# Altium PCB Bessel_SallenKey_PCB.PcbDoc
Units mm, origin at the board's own origin, x right, y up, seen from the top; angles counter-clockwise.
Board outline 37.57 x 49.43 mm, 2 copper layers (Top Layer, Bottom Layer); 33 components, 20 nets, 72 pads, 0 vias.
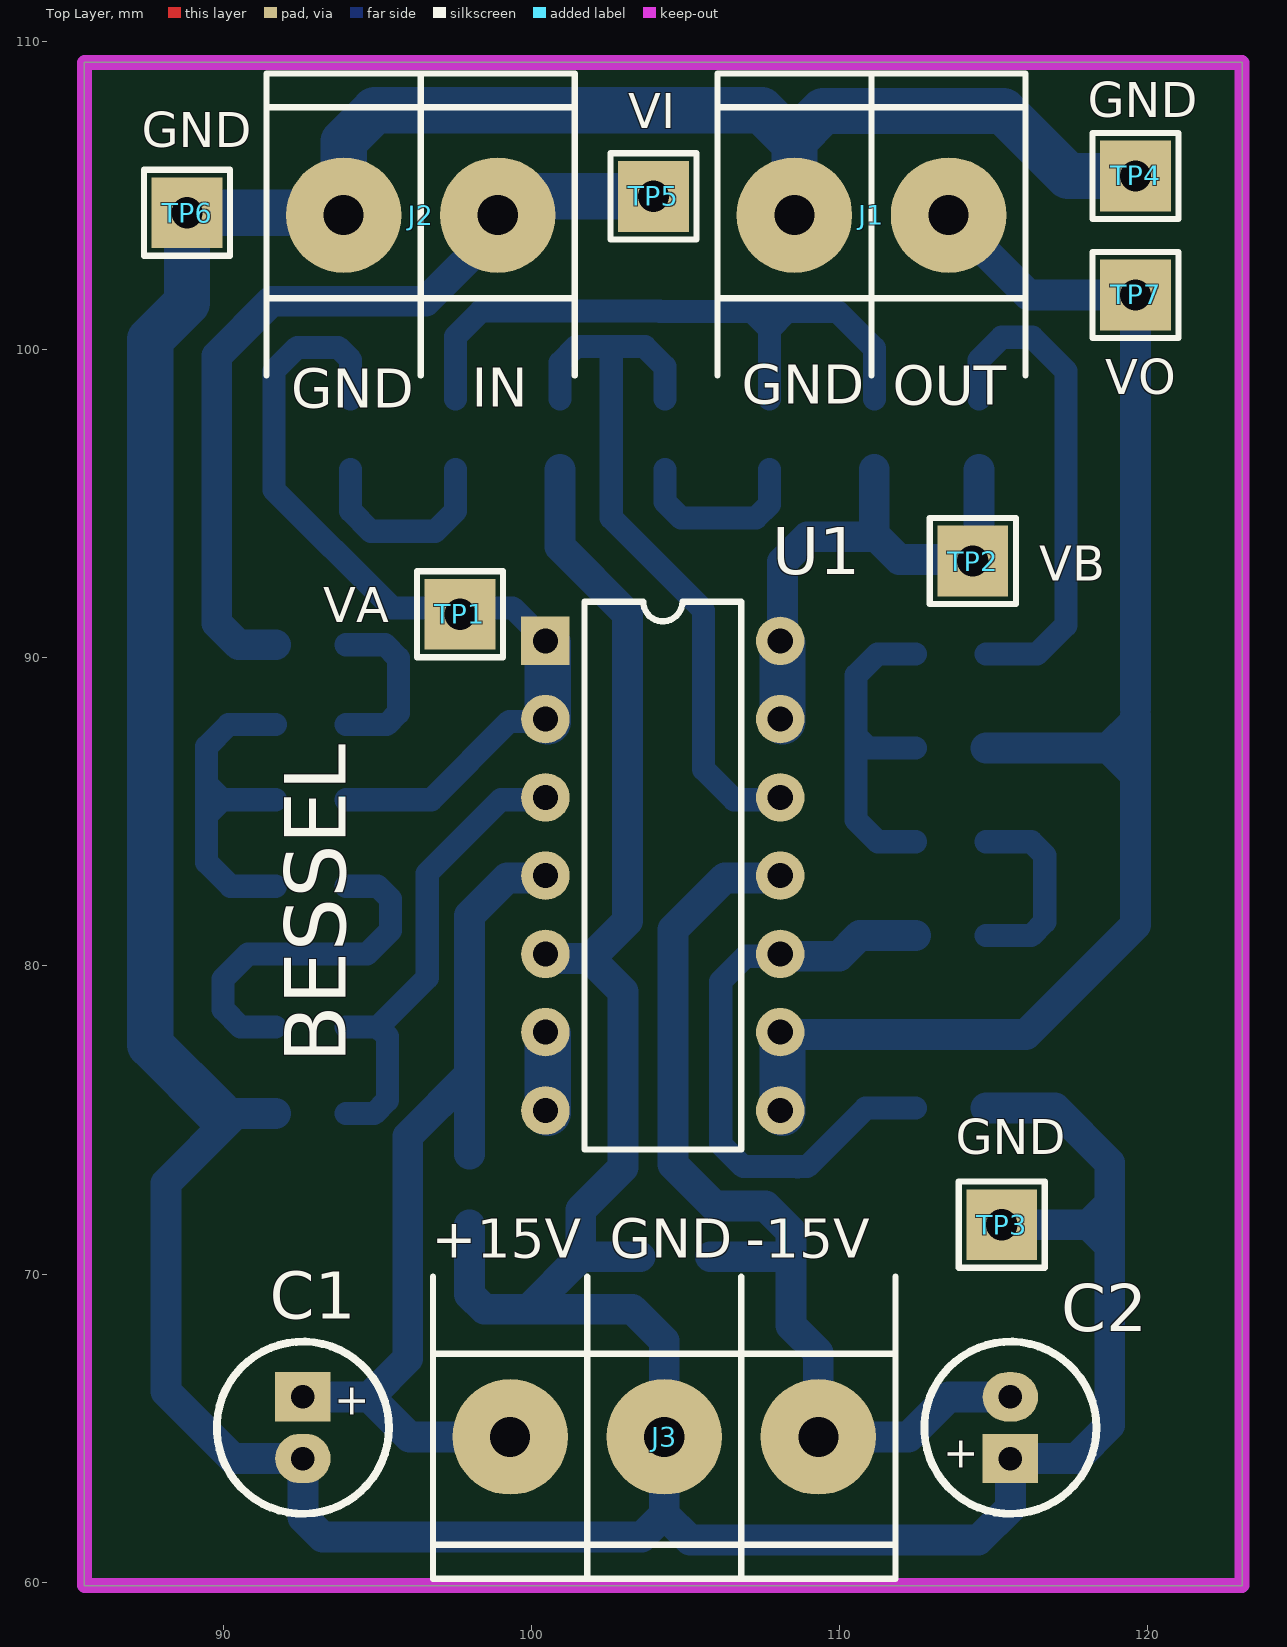
[diagram p0: Top Layer view]
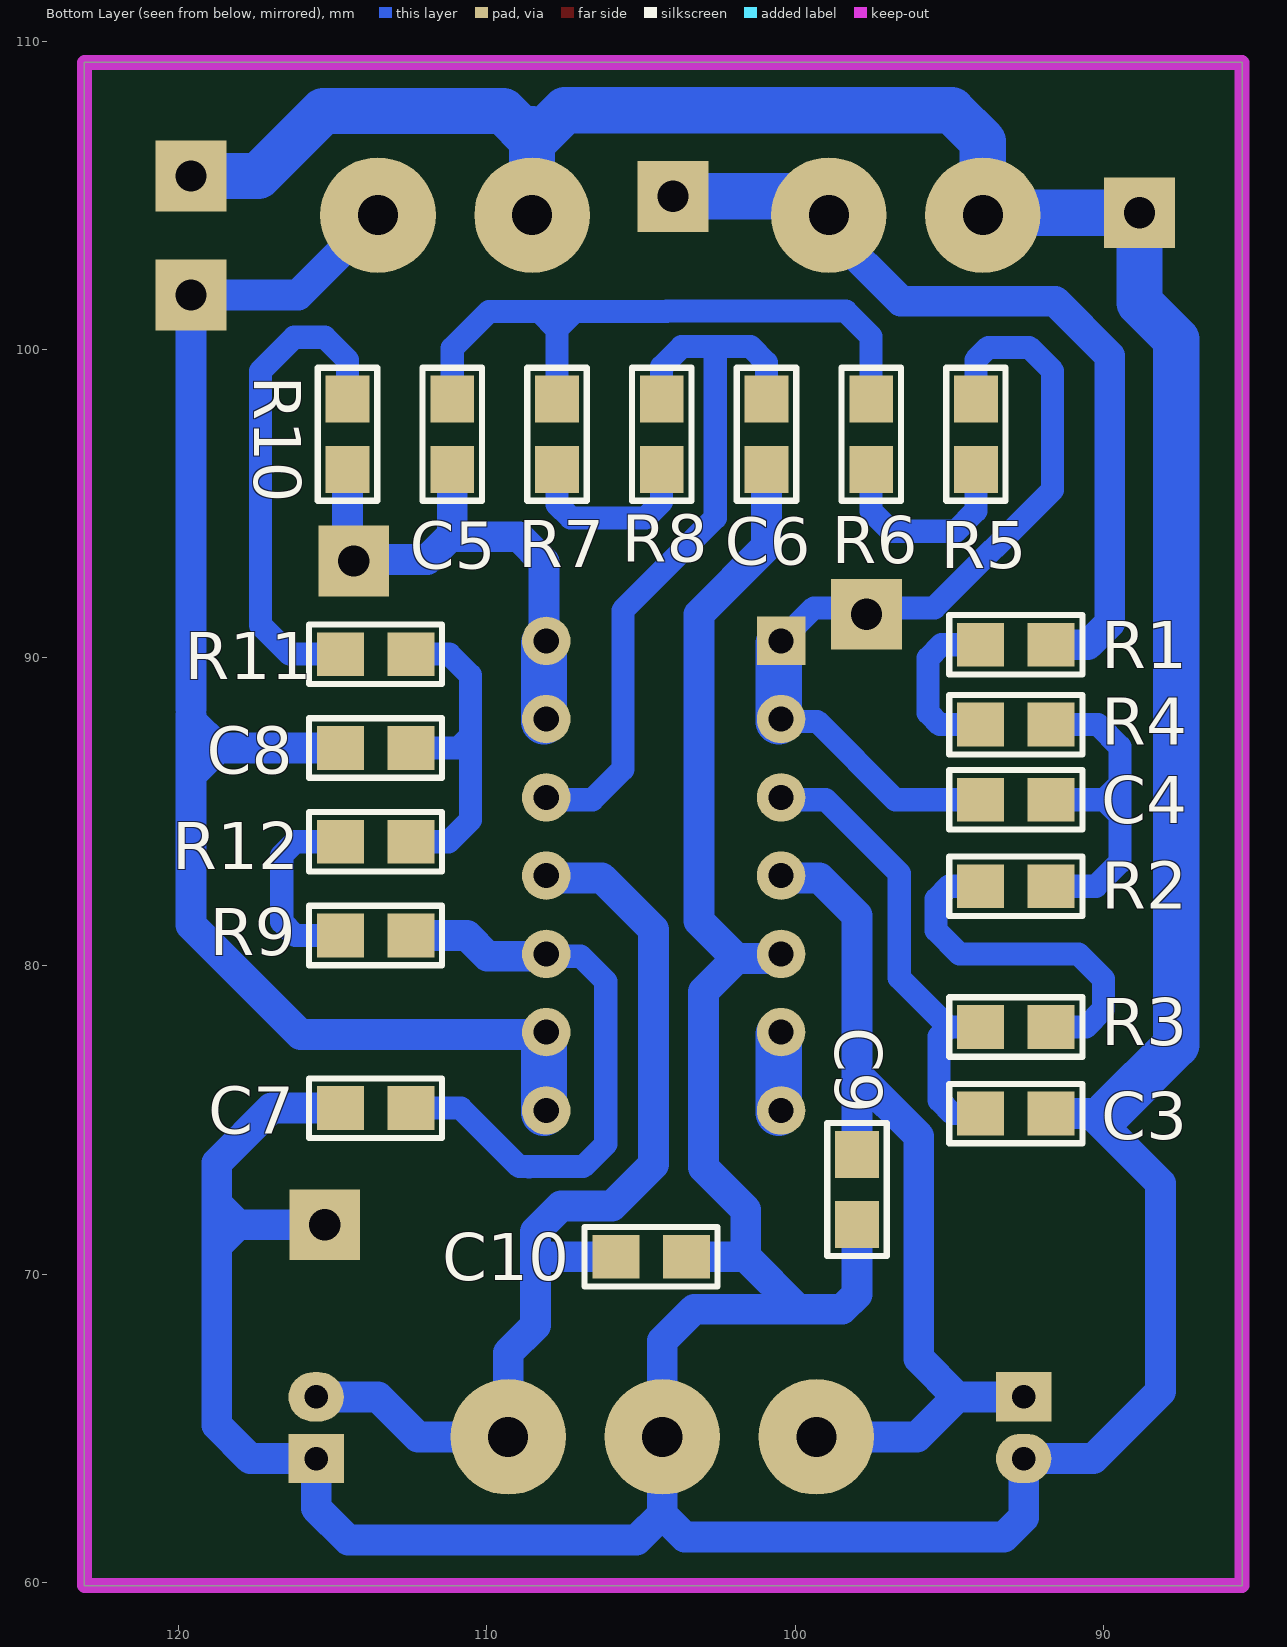
[diagram p1: Bottom Layer view, seen from below]
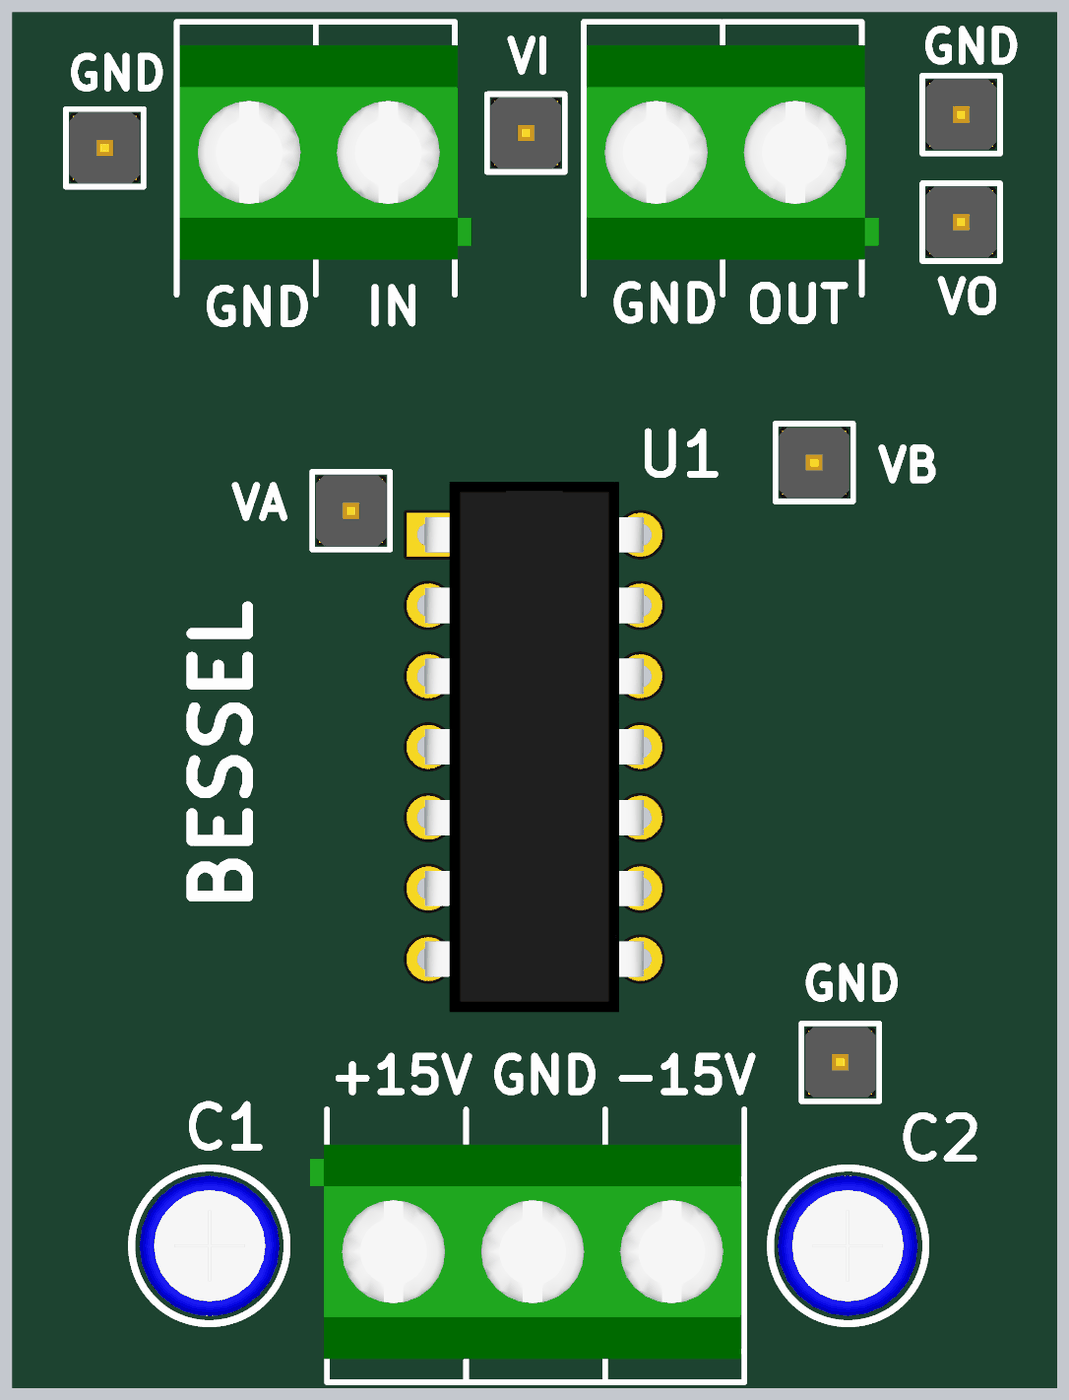
[diagram p2: 3D render of the assembled board from above, using the file's embedded part models]
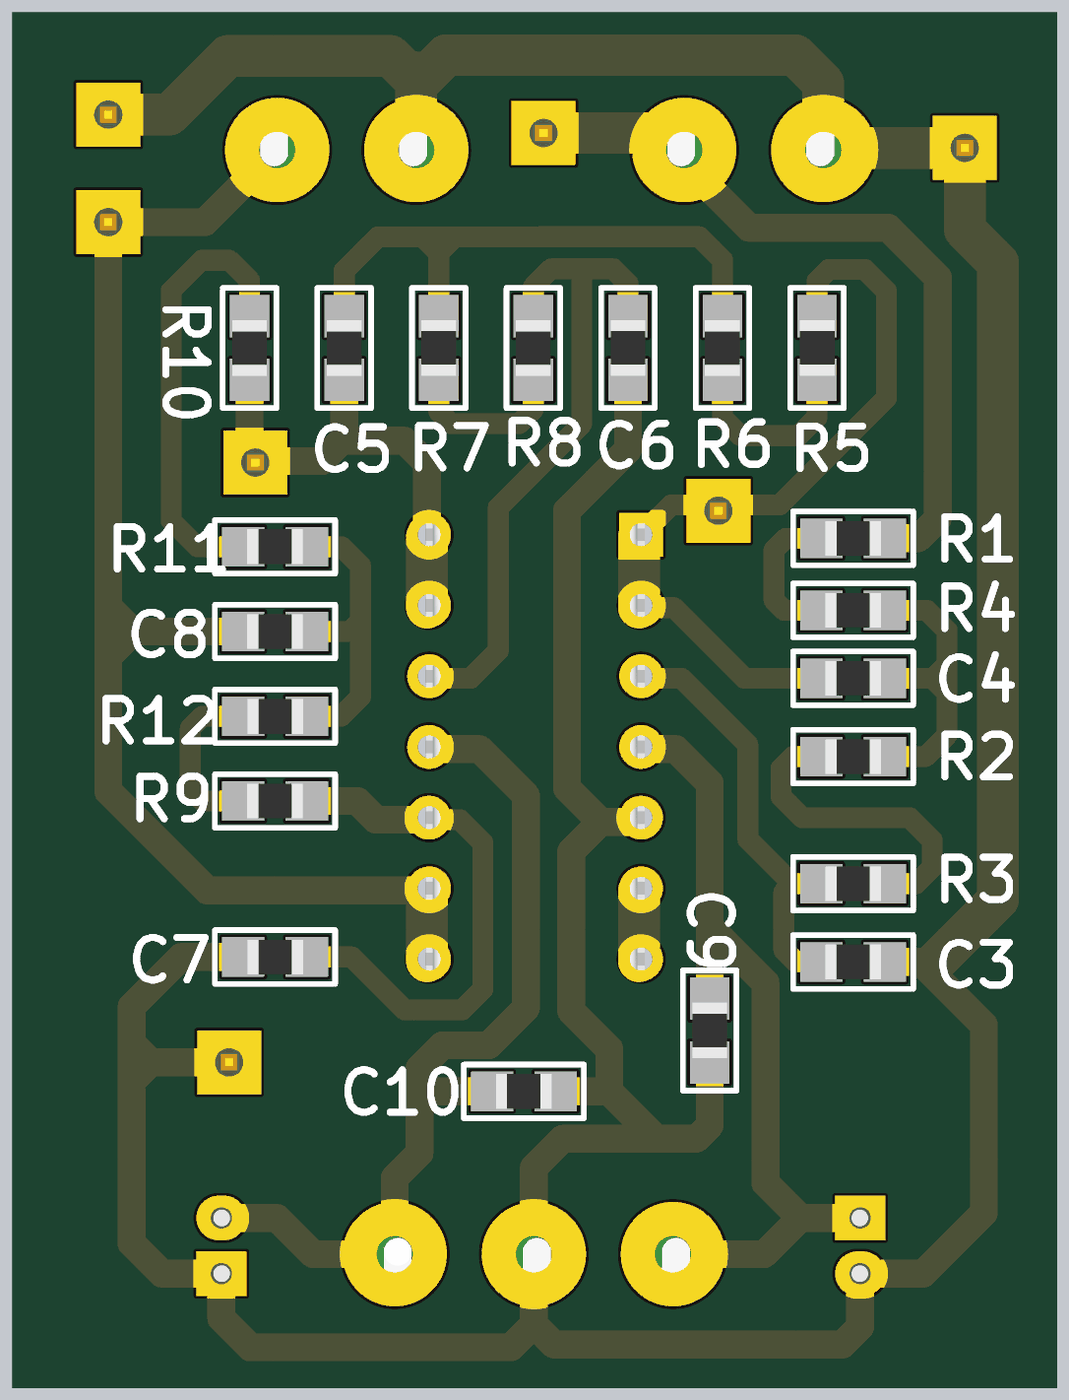
[diagram p3: 3D render of the assembled board from below, using the file's embedded part models]

## Layer stack, top to bottom
Top Solder: solder mask 0.0102, Solder Resist, Dk 3.5
Top Layer: signal copper 0.0356
Dielectric 1: dielectric 0.32, FR-4, Dk 4.8
Bottom Layer: signal copper 0.0356
Bottom Solder: solder mask 0.0102, Solder Resist, Dk 3.5

## Board outline
85.496,59.893 123.063,59.893 123.063,109.322 85.496,109.322

## Design rules (kind name [scope] priority, off if disabled: settings)
Clearance [All] p1: gap=0.4
PolygonConnect [All] p1: connectstyle=Relief reliefconductorwidth=0.254 reliefentries=4 polygonreliefangle="90 Angle" airgapwidth=0.254
RoutingVias [All] p1: holewidth=0.711 width=1.27 viastyle="Through Hole" minholewidth=0.711 minwidth=1.27 maxholewidth=0.711 maxwidth=1.27
SolderMaskExpansion [All] p1: expansion=0.102
Width [All] p1: maxlimit=1.5 minlimit=0.75 preferedwidth=1
30 further rules are at their usual default settings.

## Components (designator, comment, footprint, x,y, rotation, side; value= is the part's Value field where it differs from the comment)
C1 "10uF" CAP100RP 92.583,65.015 r270 top
C2 "10uF" CAP100RP 115.545,65.015 r90 top
C3 "CAP" 0805 92.837,75.209 r180 bottom
C4 "CAP" 0805 92.837,85.395 r180 bottom
C5 "CAP" 0805 111.129,97.257 r90 bottom
C6 "CAP" 0805 100.931,97.257 r270 bottom
C7 "CAP" 0805 113.614,75.387 r0 bottom
C8 "CAP" 0805 113.614,87.075 r180 bottom
C9 "100nF" 0805 97.993,72.746 r270 bottom
C10 "100nF" 0805 104.673,70.561 r180 bottom
J1 "BORNERA 2" BORNERA2 111.038,104.369 r270 top
J2 "BORNERA 2" BORNERA2 96.408,104.369 r270 top
J3 "BORNERA 3" BORNERA3 104.312,64.715 r90 top
R1 "RES" 0805 92.837,90.424 r0 bottom
R2 "RES" 0805 92.837,82.586 r0 bottom
R3 "RES" 0805 92.837,78.019 r0 bottom
R4 "RES" 0805 92.837,87.833 r180 bottom
R5 "RES" 0805 94.132,97.257 r270 bottom
R6 "RES" 0805 97.532,97.257 r90 bottom
R7 "RES" 0805 107.73,97.257 r270 bottom
R8 "RES" 0805 104.33,97.257 r90 bottom
R9 "RES" 0805 113.614,80.987 r180 bottom
R10 "RES" 0805 114.529,97.257 r90 bottom
R11 "RES" 0805 113.614,90.119 r180 bottom
R12 "RES" 0805 113.614,84.031 r0 bottom
TP1 "VA" TPTH 97.68,91.415 r90 top
TP2 "VB" TPTH 114.325,93.142 r90 top
TP3 "GND" TPTH 115.265,71.603 r90 top
TP4 "GND" TPTH 119.609,105.639 r90 top
TP5 "VI" TPTH 103.962,104.978 r90 top
TP6 "GND" TPTH 88.824,104.445 r90 top
TP7 "VO" TPTH 119.609,101.778 r90 top
U1 "TL084N" DIP14 100.457,90.551 r0 top

## Footprints (in the part's own frame and the unit in brackets; to place one, negate y for a bottom-side part, rotate by r counter-clockwise, add the part's x,y. Pads: shape width x height; smd on the part's side, far side on the other; paste and mask are expansions set on the pad)
0805 [mil] "Pasivo 0805"
  rect 60x56 smd: 1(-45,0) 2(45,0)
  silkscreen extent -85,-38 85,38, body extent -39,-25 39,25, height 15
BORNERA2 [mm] "Bornera con Tornillos 5mm separación"
  round 3.75 hole 1.3: 1(0,2.5) 2(0,-2.5)
  silkscreen extent -4.6,-5 5.2,5, body extent -3.76,-4.89 3.94,5.61, height 10
BORNERA3 [mm] "Bornera con Tornillos 5mm separación"
  round 3.75 hole 1.3: 1(0,5) 2(0,0) 3(0,-5)
  silkscreen extent -4.6,-7.5 5.2,7.5, body extent -3.76,-7.39 3.94,8.11, height 10.05
CAP100RP [mm] "Body diameter 5mm"
  rect 1.6x1.8 hole 0.762: 1(-1,0)
  oval 1.6x1.8 hole 0.762: 2(1,0)
  silkscreen extent -2.79,-2.79 2.79,2.79, body extent -2.53,-2.51 2.53,2.54, height 11.53
DIP14 [mil]
  rect 62x62 hole 32: 1(0,0)
  round 62 hole 32: 2(0,-100) 3(0,-200) 4(0,-300) 5(0,-400) 6(0,-500) 7(0,-600) 8(300,-600) 9(300,-500) 10(300,-400) 11(300,-300) 12(300,-200) 13(300,-100) 14(300,0)
  silkscreen extent 50,-650 250,50, body extent -5,-675 305,75, height 165
TPTH [mm]
  rect 2.3x2.3 hole 1.016: 1(0,0)
  silkscreen extent -1.4,-1.4 1.4,1.4, body extent -1.27,-1.27 1.27,1.27, height 6.04

## Part data
C1 C2: library part CAPPOL
C9 C10: library part CAP
TP1 TP2 TP3 TP4 TP5 TP6 TP7: library part TP
U1: "JFET-Input Operational Amplifier"

## Nets (pads, with @x,y where several pads share a name; then routed paths per layer and width w, separated by ;. In a path a pad name is that pad's centre, name@x,y a point inside that pad or via, vN(x,y) a via of type N, cw(c..) or ccw(c..) an arc to the next point about the centre after c; other vN are vias at no path point)
+VCC: C1.1 C9.1 J3.1 U1.4 | length 29.9
  Bottom Layer w1: C1.1 94.742,66.015 ; C9.1 97.993,76.479 ; J3.1 96.042,64.715 94.742,66.015 ; U1.4@100.533,82.855 99.212,82.855 97.993,81.636 97.993,76.479 ; 94.742,66.015 95.987,67.259 95.987,74.473 97.993,76.479
-VCC: C2.2 C10.1 J3.3 U1.11 | length 33
  Bottom Layer w1: C10.1 108.347,70.561 108.423,70.485 ; U1.11@108.153,82.855 106.274,82.855 104.597,81.178 104.597,73.558 105.943,72.212 107.594,72.212 108.423,71.383 108.423,70.485 ; C2.2 113.538,66.015 112.238,64.715 J3.3 109.312,67.446 108.423,68.335 108.423,70.485
GND: C1.2 C2.1 C3.2 C6.2 C7.2 C9.2 C10.2 J1.2 J2.2 J3.2 TP3.1 TP4.1 TP6.1 U1.5 | length 184.4
  Bottom Layer w0.75: 118.77,70.612 118.77,70.739 117.907,71.603 118.77,72.466 118.77,72.568
  Bottom Layer w1: 89.865,75.209 90.399,75.209 ; C3.2 90.399,75.209 ; C9.2 97.993,69.342 98.476,68.859 99.898,68.859 ; U1.5@100.305,80.442 100.508,80.239 101.905,80.239 ; C6.2 100.931,93.607 103.124,91.415 103.124,81.458 101.905,80.239 ; C10.2 101.6,70.561 ; C7.2 116.992,75.387 118.77,73.609 118.77,72.568 ; TP3.1 117.907,71.603 118.745,71.603 118.77,71.628 ; 118.77,70.612 118.77,65.1 117.685,64.015 C2.1 115.545,62.408 114.503,61.366 105.145,61.366 104.312,62.199 ; 118.77,70.739 118.77,71.628 ; 118.77,72.466 118.77,71.628 ; 90.399,75.209 88.138,72.949 88.138,66.192 90.316,64.015 C1.2 92.583,62.103 93.218,61.468 103.581,61.468 104.312,62.199 ; 99.898,68.859 103.276,68.859 104.312,67.824 J3.2 104.312,62.199 ; 99.898,68.859 101.6,70.561 ; 101.6,70.561 101.6,72.085 102.972,73.457 102.972,79.172 101.905,80.239
  Bottom Layer w1.5: 89.865,75.209 87.63,77.445 87.63,100.33 88.824,101.524 TP6.1 93.908,104.445 93.908,106.76 94.92,107.772 107.467,107.772 108.309,106.93 108.538,107.159 ; J1.2@108.538,104.978 108.538,106.811 109.474,107.747 115.316,107.747 117.424,105.639 TP4.1
NetC3_1: C3.1 R3.2 U1.3 | length 15.6
  Bottom Layer w0.75: C3.1 94.894,75.209 95.326,75.641 95.326,77.714 95.021,78.019 ; R3.2 95.021,78.019 ; U1.3@100.533,85.395 99.009,85.395 96.622,83.007 96.622,79.619 95.021,78.019
NetC4_2: C4.2 R2.1 R4.2 | length 12.6
  Bottom Layer w0.75: R2.1 90.236,82.586 89.459,83.363 89.459,84.887 ; C4.2 89.967,85.395 ; R4.2 90.17,87.833 89.459,87.122 89.459,85.903 ; 89.459,84.887 89.459,85.496 ; 89.459,84.887 89.967,85.395 ; 89.459,85.496 89.459,85.903 ; 89.459,85.496 89.56,85.395 89.967,85.395 ; 89.459,85.903 89.967,85.395
NetC5_2: C5.2 R6.2 R7.1 | length 22.6
  Bottom Layer w0.75: R6.2 97.532,100.427 98.356,101.251 104.159,101.251 104.166,101.244 107.154,101.244 ; R7.1 107.73,100.669 ; C5.2 111.129,100.046 109.931,101.244 108.306,101.244 ; 107.154,101.244 107.594,101.244 ; 107.154,101.244 107.73,100.669 ; 107.594,101.244 108.306,101.244 ; 107.594,101.244 107.73,101.109 107.73,100.669 ; 107.73,100.669 108.306,101.244
NetC6_1: C6.1 R8.2 U1.12 | length 24.1
  Bottom Layer w0.75: C6.1 100.931,99.585 101.448,100.101 102.591,100.101 ; R8.2 104.33,99.454 103.683,100.101 102.591,100.101 ; U1.12@108.153,85.395 106.578,85.395 105.588,86.385 105.588,91.542 102.591,94.539 102.591,100.101
NetC7_1: C7.1 R9.2 U1.10 | length 19.6
  Bottom Layer w0.75: U1.10@108.153,80.315 106.959,80.315 106.147,79.502 106.147,74.219 106.878,73.487 108.631,73.487 ; 108.636,73.482 108.631,73.487 ; C7.1 110.846,75.387 108.946,73.487 108.631,73.487
  Bottom Layer w1: U1.10@108.153,80.315 109.982,80.315 110.654,80.987 R9.2
NetC8_2: C8.2 R11.2 R12.1 | length 11.2
  Bottom Layer w0.75: R12.1 111.244,84.031 110.541,84.734 110.541,87.452 ; C8.2 110.918,87.075 110.541,87.452 ; R11.2 111.227,90.119 110.541,89.433 110.541,87.452
NetR1_2: R1.2 R4.1 | length 5.5
  Bottom Layer w0.75: R4.1 95.301,87.833 95.682,88.214 95.682,89.992 95.25,90.424 R1.2
NetR2_2: R2.2 R3.1 | length 11.7
  Bottom Layer w0.75: R3.1 90.561,78.019 89.992,78.588 89.992,79.578 90.805,80.391 94.666,80.391 95.428,81.153 95.428,82.169 95.011,82.586 R2.2
NetR5_2: R5.2 R6.1 | length 6.6
  Bottom Layer w0.75: R5.2 94.132,94.767 94.793,94.107 96.876,94.107 97.532,94.763 R6.1
NetR7_2: R7.2 R8.1 | length 6
  Bottom Layer w0.75: R8.1 104.33,95.06 104.851,94.539 107.29,94.539 107.73,94.979 R7.2
NetR9_1: R9.1 R12.2 | length 6.3
  Bottom Layer w0.75: R9.1 116.216,80.987 116.662,81.432 116.662,83.591 116.223,84.031 R12.2
NetR10_2: R10.2 R11.1 | length 16.1
  Bottom Layer w0.75: R10.2 114.529,99.67 115.265,100.406 116.256,100.406 117.348,99.314 117.348,91.059 116.408,90.119 R11.1
NetU1_6: U1.6 U1.7 | length 2.5
  Bottom Layer w1.5: U1.7@100.533,75.235 U1.6@100.533,77.775
VA: C4.1 R5.1 TP1.1 U1.1 U1.2 | length 29.2
  Bottom Layer w0.75: C4.1 96.749,85.395 99.289,87.935 U1.2@100.533,87.935 ; R5.1 94.132,99.67 93.726,100.076 92.405,100.076 91.643,99.314 91.643,95.453 95.479,91.618 99.39,91.618 U1.1 U1.1@100.533,90.475
  Bottom Layer w1.5: U1.2@100.533,87.935 U1.1@100.533,90.475
VB: C5.1 R10.1 TP2.1 U1.13 U1.14 | length 16.9
  Bottom Layer w1: U1.14@108.153,90.475 108.153,93.116 108.966,93.929 111.201,93.929 ; C5.1 111.129,94.001 111.201,93.929 ; R10.1 114.529,93.904 113.817,93.193 111.938,93.193 111.201,93.929
  Bottom Layer w1.5: U1.13@108.153,87.935 U1.14@108.153,90.475
VI: J2.1 R1.1 TP5.1 | length 27.8
  Bottom Layer w1: R1.1 90.5,90.424 89.789,91.135 89.789,99.797 91.567,101.575 96.571,101.575 98.908,103.911 J2.1 J2.1@98.908,104.978
  Bottom Layer w1.5: J2.1@98.908,104.978 TP5.1
VO: C8.1 J1.1 TP7.1 U1.8 U1.9 | length 51.1
  Bottom Layer w0.75: 119.609,85.954 119.609,86.008 118.542,87.075 119.609,88.142 119.609,88.341
  Bottom Layer w1: U1.9@108.204,77.724 108.153,77.775 116.053,77.775 119.609,81.331 119.609,85.954 ; J1.1 116.129,101.778 TP7.1 119.609,88.341 ; C8.1 118.542,87.075 119.452,87.075 119.609,87.231 ; 119.609,86.008 119.609,87.231 ; 119.609,88.142 119.609,87.231
  Bottom Layer w1.5: U1.8@108.153,75.235 U1.9@108.153,77.775

## Keep-outs
Keep-Out Layer:
  the board outline again, w0.5

## Silkscreen, mask and mechanical layers (free items; w line width, h text height)
Top Overlay:
  text "GND" at 106.832,98.247 h1.27
  text "OUT" at 111.735,98.222 h1.27
  text "IN" at 98.069,98.146 h1.27
  text "GND" at 92.202,98.12 h1.27
  text "BESSEL" at 93.98,76.835 h2 r90
  text "+15V" at 96.774,70.536 h1.27
  text "GND" at 102.54,70.536 h1.27
  text "-15V" at 106.959,70.536 h1.27

## Text inside footprints (layer, text, board x,y; h text height)
C1: Top Overlay "+" at 93.751,66.462 h1.02 r270
C2: Top Overlay "+" at 114.376,63.567 h1.02 r90